# EAGLE board TMCS1101A4 (EAGLE 9.6.2)
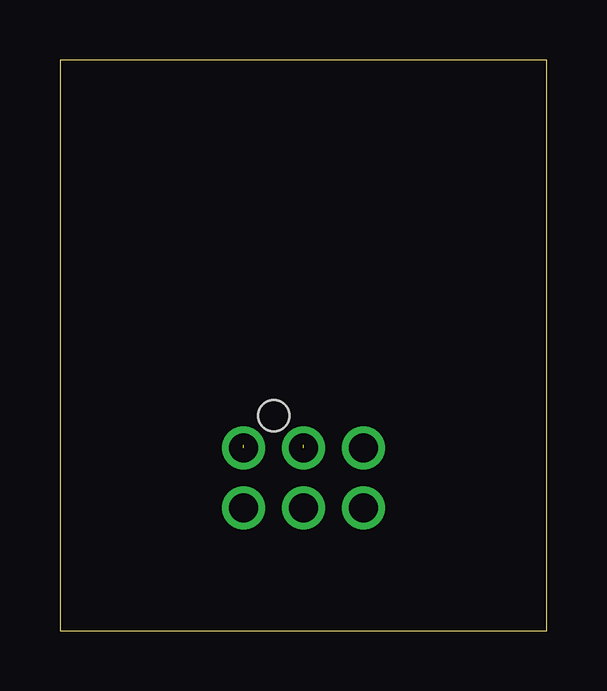
[diagram p0: board, top side]
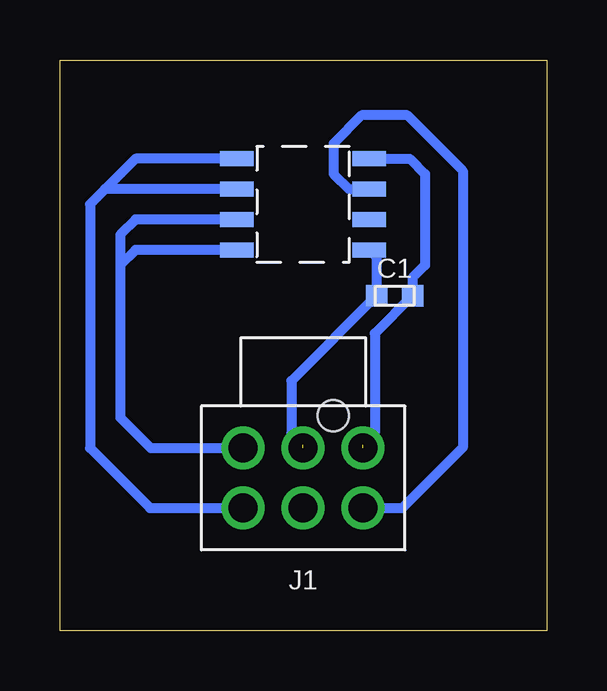
[diagram p1: board, bottom side, seen from below]

Size 20.3 x 23.8 mm. Coordinates in mm from the lower left corner, seen from the top.
Outline: 0,0 20.3,0 20.3,23.8 0,23.8 0,0
Copper layers (1*16): Top 0.035mm / dielectric 1.5mm / Bottom 0.035mm
Design rules "default": minimum track width 6mil, minimum drill 0.35mm, track to track 6mil, track to pad 6mil, pad to pad 6mil, via to via 6mil, smd to smd 6mil, copper to edge 40mil, drill to drill 6mil, minimum pad ring 10mil, minimum via ring 8mil, stop-mask expansion 4mil, vias tented up to drill 0mil, thermal gap 10mil

## Footprints (pad centres in the part's own frame; a part is rotated, then mirrored left to right if it is on the bottom)
0603-CAP = smd 0.9 x 0.9: 1 -0.75,0; 2 0.75,0
MOLEX_NANOFIT_PTH_06 = drill 1.2: 1 2.5,0; 2 0,0; 3 -2.5,0; 4 2.5,-2.5; 5 0,-2.5; 6 -2.5,-2.5 | hole 1.3: 1.25,1.34
SOIC8 = smd 1.397 x 0.61: P$1 -2.756,1.905; P$2 -2.756,0.635; P$3 -2.756,-0.635; P$4 -2.756,-1.905; P$5 2.756,-1.905; P$6 2.756,-0.635; P$7 2.756,0.635; P$8 2.756,1.905

## Placement (x,y rotation side)
C1  CAPACITOR_0603_10V_0.1UF  [0603-CAP]  6.35,13.97 0 bottom
J1  CONNECTOR-6_NF_T_V_BLACK  [MOLEX_NANOFIT_PTH_06]  10.16,7.62 0 bottom
U$1  TMCS1101A4  [SOIC8]  10.16,17.78 0 bottom

## Library data of the parts
C1 = HyTechDevices; CAPACITANCE: 0.1µF; DKPN: 720-1688-1-ND; MANUFACTURER: Vishay Vitramon; MOPN: 77-VJ0603Y104JXQPBC; MPN: VJ0603Y104JXQPW1BC; TOLERANCE: 5%; VOLTAGE: 10V
J1 = HyTechDevices; MANUFACTURER: Molex; MPN: 105310-1306
U$1 = test; DKPN: 296-TMCS1101A4UQDRQ1CT-ND; MANUFACTURER: Texas Instruments; MOPN: TMCS1101A4UQDRQ1; MPN: 595-TMCS1101A4UQDRQ1

## Nets
+5V: C1.2 J1.1 U$1.P$8
GND: C1.1 J1.2 U$1.P$5
IN+: J1.6 U$1.P$1 U$1.P$2
IN-: J1.3 U$1.P$3 U$1.P$4
VOUT: J1.4 U$1.P$7

## Tracks (layer width: path | path; a pad name or v marks a point on that pad's centre or on a via)
+5V  (1 unrouted)
  Bottom 0.406: U$1.P$8 5.72,19.69 5.08,19.05 5.08,15.24 5.6,14.72 C1.2 7.17,12.4 7.17,8.24 7.66,7.75
GND  (1 unrouted)
  Bottom 0.406: 10.16,7.75 10.65,8.24 10.65,10.42 C1.1 7.1,15.57 U$1.P$5
IN+
  Bottom 0.406: U$1.P$1 17.15,19.69 18.41,18.41 | 18.41,18.41 19.05,17.78 19.05,7.62 16.55,5.12 J1.6 | U$1.P$2 18.41,18.41
IN-
  Bottom 0.406: U$1.P$3 17.15,17.14 17.78,16.51 17.78,15.24 | 17.78,15.24 17.78,8.89 16.51,7.62 J1.3 | U$1.P$4 17.15,15.88 17.78,15.24
VOUT
  Bottom 0.406: J1.4 6.02,5.12 3.51,7.64 3.51,19.18 5.82,21.49 7.72,21.49 8.89,20.32 8.89,19.05 8.26,18.41 U$1.P$7